# Altium PCB PCB2.pcbdoc
Units mm, origin at the board's own origin, x right, y up, seen from the top; angles counter-clockwise.
Board outline 197.89 x 109.4 mm, 2 copper layers (Top Layer, Bottom Layer); 49 components, 26 nets, 193 pads, 0 vias.
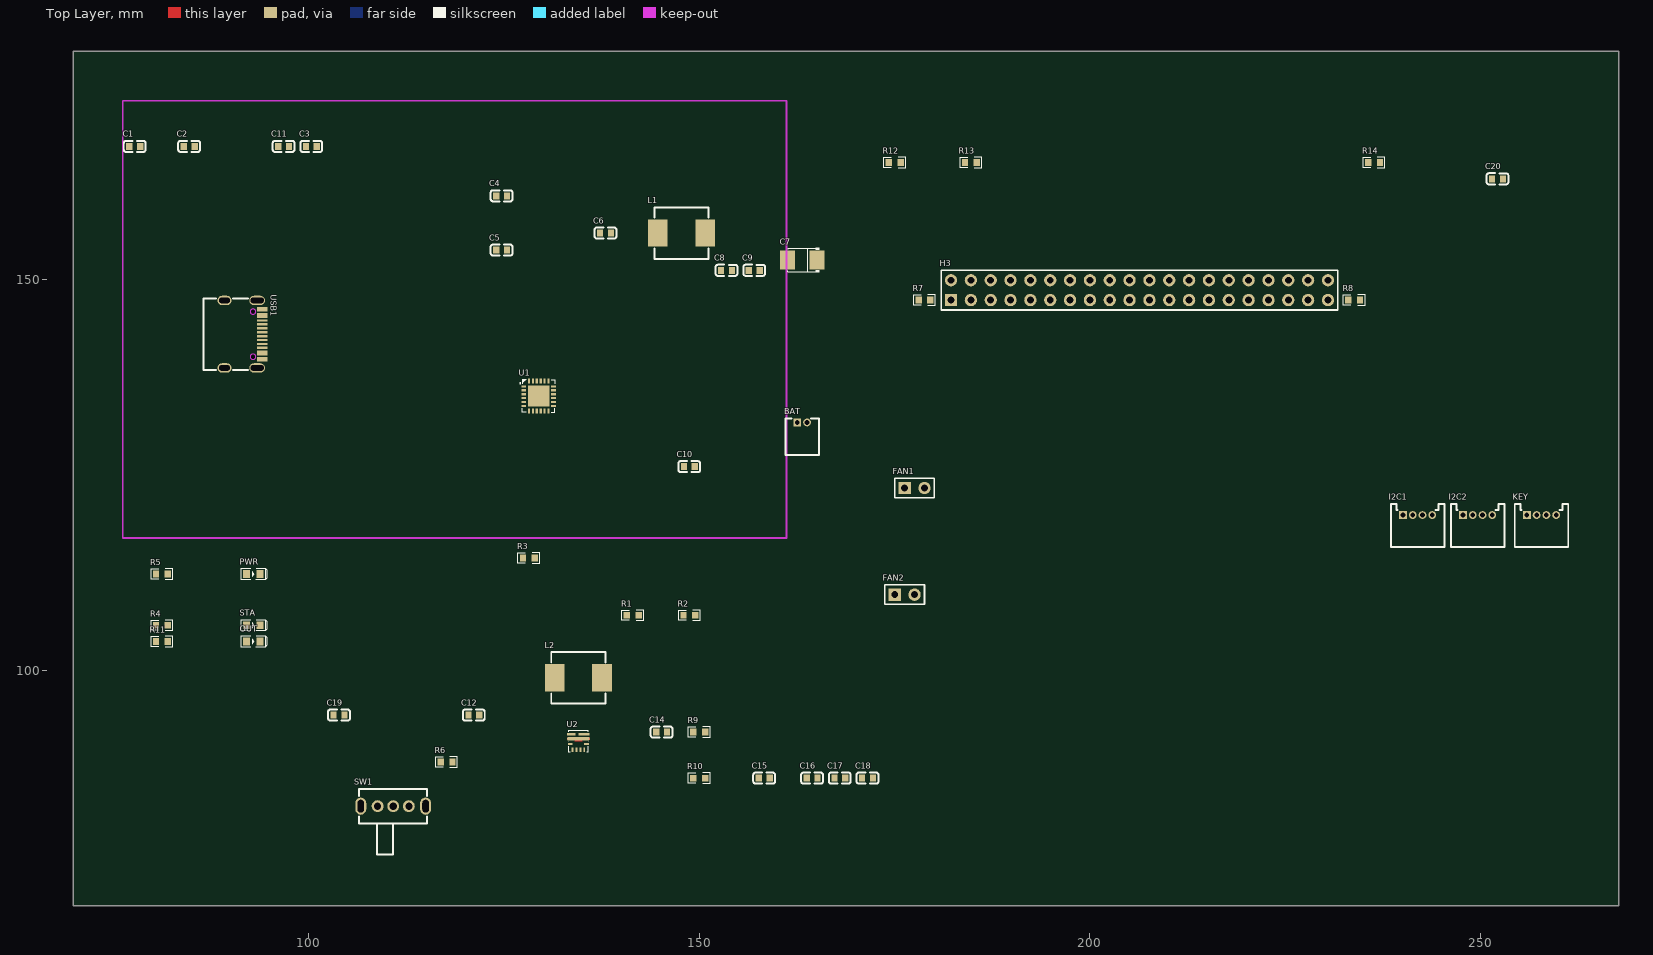
[diagram p0: Top Layer view]
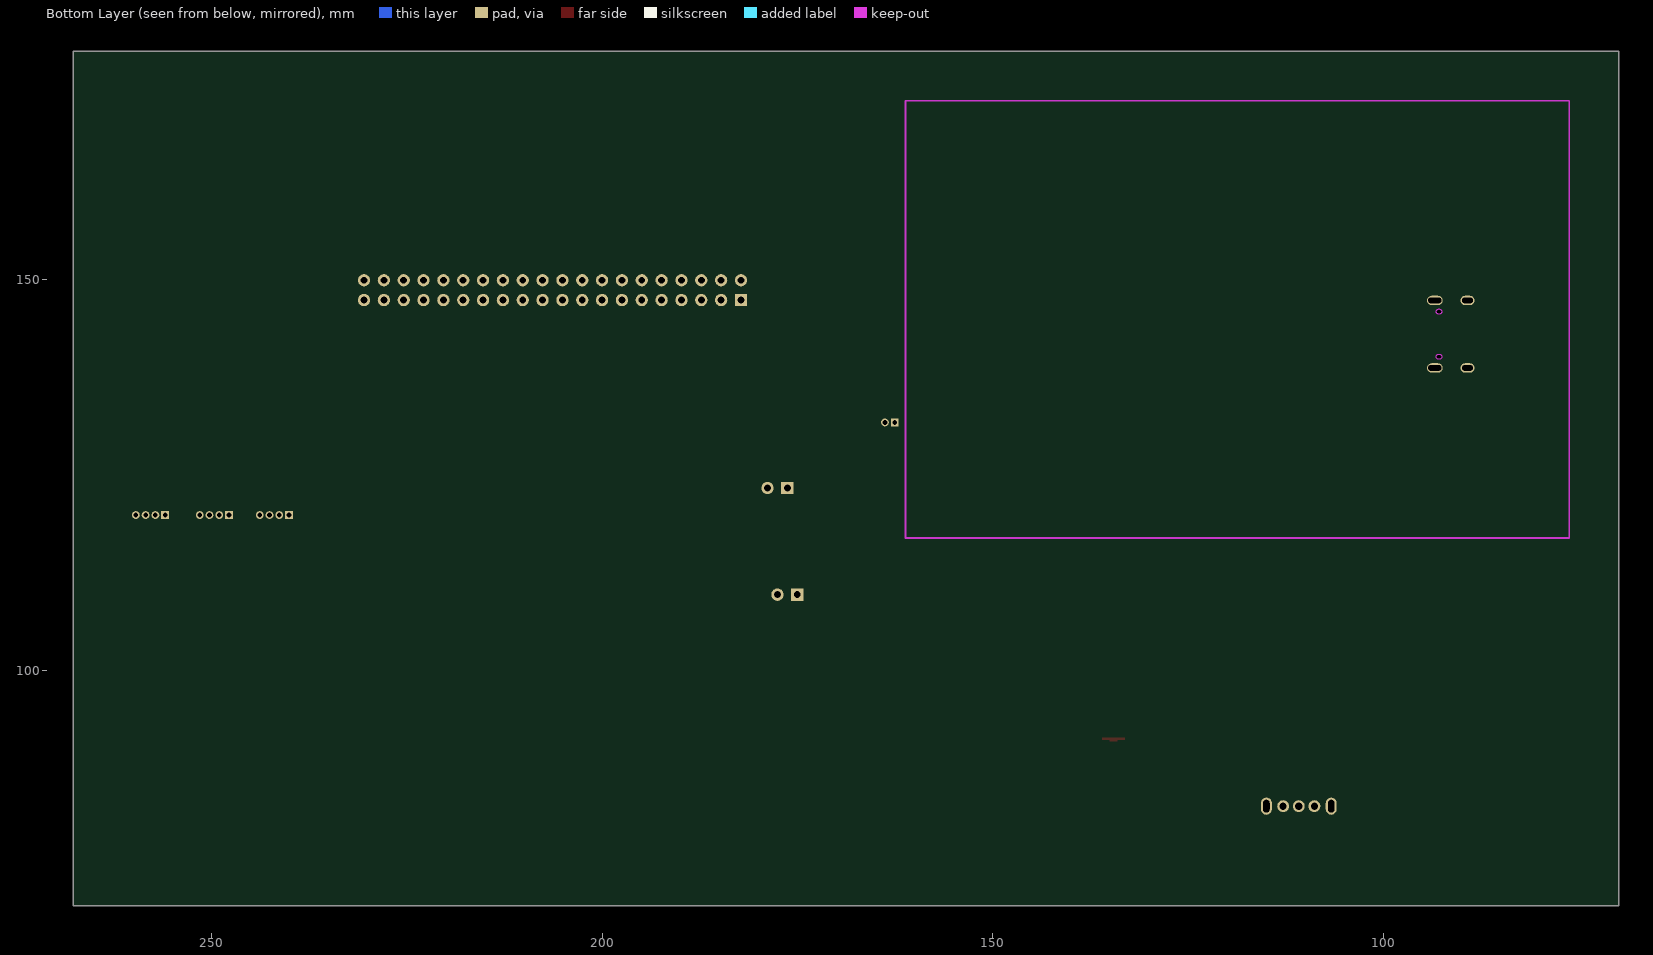
[diagram p1: Bottom Layer view, seen from below]

## Layer stack, top to bottom
Top Layer: signal copper (thickness not stored)
Dielectric: dielectric 0.32, FR-4, Dk 4.8
Bottom Layer: signal copper (thickness not stored)

## Board outline
267.742,69.85 69.85,69.85 69.85,179.251 267.742,179.251

## Components (designator, comment, footprint, x,y, rotation, side; value= is the part's Value field where it differs from the comment)
BAT "1.25-2AW_C2829717" CONN-TH_1.25-2AW_C2829717 163.19,131.72 r0 top
C1 "1u" C0603 77.733,167.059 r0 top
C2 "10u" C0603 84.705,167.059 r0 top
C3 "22u" C0603 100.346,167.059 r0 top
C4 "10u" C0603 124.706,160.727 r0 top
C5 "10u" C0603 124.706,153.783 r0 top
C6 "47n" C0603 138.017,155.962 r0 top
C7 "220u" CAP-SMD_L3.5-W2.8-R-RD 163.19,152.513 r0 top
C8 "10u" C0603 153.504,151.193 r0 top
C9 "10u" C0603 157.054,151.193 r0 top
C10 "10u" C0603 148.741,126.051 r0 top
C11 "10u" C0603 96.797,167.059 r0 top
C12 "1u" C0603 121.156,94.251 r0 top
C14 "33n" C0603 145.191,92.072 r0 top
C15 "22u" C0603 158.324,86.176 r0 top
C16 "22u" C0603 164.46,86.176 r0 top
C17 "22u" C0603 168.009,86.176 r0 top
C18 "22u" C0603 171.559,86.176 r0 top
C19 "10u" C0603 103.896,94.251 r0 top
C20 "CAP_0603" C0603 252.208,162.906 r0 top
FAN1 "FAN" HDR-F-2.54_1X2 177.577,123.317 r0 top
FAN2 "FAN" HDR-F-2.54_1X2 176.307,109.667 r0 top
H3 "HDR-F-2.54_2x20" HDR-F-2.54_2X20 206.372,148.653 r0 top
I2C1 "1.25-4AW" CONN-TH_1.25-4AW 241.976,119.859 r0 top
I2C2 "1.25-4AW" CONN-TH_1.25-4AW 249.668,119.859 r0 top
KEY "1.25-4AW" CONN-TH_1.25-4AW 257.84,119.859 r0 top
L1 "1uH" IND-SMD_L7.0-W6.6_MPCA-0630 147.731,155.962 r0 top
L2 "1uH" IND-SMD_L7.0-W6.6_MPCA-0630 134.534,99.021 r0 top
OUT "LED-0603_G" LED0603_GREEN 92.914,103.685 r0 top
PWR "LED-0603_G" LED0603_GREEN 92.914,112.301 r0 top
R1 "10k" R0603 141.495,107.022 r0 top
R2 "10k" R0603 148.741,107.022 r0 top
R3 "10k" R0603 128.184,114.368 r0 top
R4 "2.2k" R0603 81.211,105.752 r0 top
R5 "2.2k" R0603 81.211,112.301 r0 top
R6 "10k" R0603 117.662,88.255 r0 top
R7 "10k" R0603 178.847,147.383 r0 top
R8 "10k" R0603 233.861,147.383 r0 top
R9 "620k" R0603 150.011,92.072 r0 top
R10 "200k" R0603 150.011,86.176 r0 top
R11 "2.2k" R0603 81.211,103.685 r0 top
R12 "10k" R0603 175.037,164.985 r0 top
R13 "10k" R0603 184.782,164.985 r0 top
R14 "10k" R0603 236.401,164.985 r0 top
STA "LED-0603_G" LED0603_GREEN 92.914,105.752 r0 top
SW1 "SK12D07VG4" SW-TH_SK12D07VG4 110.825,82.587 r0 top
U1 "BQ25895RTWR" QFN-24_L4.0-W4.0-P0.50-TL-EP2.7 129.454,135.083 r0 top
U2 "TPS61236PRWLR" VQFN-9_L2.5-W2.5-P0.50-TL 134.534,90.802 r0 top
USB1 "KH-TYPE-C-16P" USB-C-SMD_KH-TYPE-C-16P 91.644,143.019 r270 top

## Footprints (in the part's own frame and the unit in brackets; to place one, negate y for a bottom-side part, rotate by r counter-clockwise, add the part's x,y. Pads: shape width x height; smd on the part's side, far side on the other; paste and mask are expansions set on the pad)
C0603 [mm]
  rect 0.8x0.9 smd: 1(-0.7,0) 2(0.7,0)
  silkscreen extent -1.41,-0.71 1.39,0.72
CAP-SMD_L3.5-W2.8-R-RD [mm]
  rect 1.9x2.376 smd: 1(1.899,0) 2(-1.899,0)
  silkscreen extent -1.83,-1.55 2.21,1.55
CONN-TH_1.25-2AW_C2829717 [mm]
  rect 1x1 hole 0.6: 1(-0.625,0)
  round 1 hole 0.6 copper offset 0,0: 2(0.625,0)
  silkscreen extent -2.12,-4.2 2.13,0.51
CONN-TH_1.25-4AW [mm]
  rect 1x1 hole 0.6: 1(-1.875,0)
  round 1 hole 0.6: 2(-0.625,0) 3(0.625,0) 4(1.875,0)
  silkscreen extent -3.42,-4.06 3.43,1.4
HDR-F-2.54_1X2 [mil]
  rect 62x62 hole 35: 1(-50,0)
  round 62 hole 35: 2(50,0)
  silkscreen extent -100,-49 100,50
HDR-F-2.54_2X20 [mil]
  rect 62x62 hole 35: 1(-950.01,-50)
  round 62 hole 35: 2(-950.01,50) 3(-850.01,-50) 4(-850.01,50) 5(-750.01,-50) 6(-750.01,50) 7(-650.01,-50) 8(-650.01,50) 9(-550.01,-50) 10(-550.01,50) 11(-450.01,-50) 12(-450.01,50) 13(-350.01,-50) 14(-350.01,50) 15(-250.01,-50) 16(-250.01,50) 17(-150.01,-50) 18(-150.01,50) 19(-50.01,-50) 20(-50.01,50) 21(49.99,-50) 22(49.99,50) 23(149.99,-50) 24(149.99,50) 25(249.99,-50) 26(249.99,50) 27(349.99,-50) 28(349.99,50) 29(449.99,-50) 30(449.99,50) 31(549.99,-50) 32(549.99,50) 33(649.99,-50) 34(649.99,50) 35(749.99,-50) 36(749.99,50) 37(849.99,-50) 38(849.99,50) 39(949.99,-50) 40(949.99,50)
  silkscreen extent -1000,-100 1000,100
IND-SMD_L7.0-W6.6_MPCA-0630 [mm]
  rect 2.5x3.5 smd: 1(-3.025,0) 2(3.025,0)
  silkscreen extent -3.47,-3.3 3.48,3.3
LED0603_GREEN [mm]
  rect 0.9x1 smd: 1(-0.85,0) 2(0.85,0)
  silkscreen extent -1.54,-0.73 1.75,0.73
QFN-24_L4.0-W4.0-P0.50-TL-EP2.7 [mm]
  rect 0.633x0.28 smd: 1(-1.912,1.25) 2(-1.912,0.75) 3(-1.912,0.25) 4(-1.912,-0.25) 5(-1.912,-0.75) 6(-1.912,-1.25) 13(1.912,-1.25) 14(1.912,-0.75) 15(1.912,-0.25) 16(1.912,0.25) 17(1.912,0.75) 18(1.912,1.25)
  rect 0.28x0.633 smd: 7(-1.25,-1.912) 8(-0.75,-1.912) 9(-0.25,-1.912) 10(0.25,-1.912) 11(0.75,-1.912) 12(1.25,-1.912) 19(1.25,1.912) 20(0.75,1.912) 21(0.25,1.912) 22(-0.25,1.912) 23(-0.75,1.912) 24(-1.25,1.912)
  rect 2.7x2.7 smd: 25(0,0)
  silkscreen extent -2.42,-2.08 2.08,2.08
R0603 [mm]
  rect 0.806x0.864 smd: 1(-0.753,0) 2(0.753,0)
  silkscreen extent -1.39,-0.66 1.39,0.66
SW-TH_SK12D07VG4 [mil]
  round 60 hole 36: 1(-78.74,0) 2(0,0) 3(78.74,0)
  oval 55.12x86.61 hole 31.5 slot 62.99 at 90 deg: 4(163.39,0) 5(-163.39,0)
  silkscreen extent -171,-244 171,87
USB-C-SMD_KH-TYPE-C-16P [mm]
  oval 1.2x2 hole 0.7 slot 1.7 at 90 deg: 1(-4.32,1.765) 2(4.32,1.765)
  oval 1.2x1.8 hole 0.7 slot 1.4 at 90 deg: 3(-4.32,-2.415) 4(4.32,-2.415)
  rect 0.3x1.3 smd: A1(-3.35,2.415) A4(-2.55,2.415) A5(-1.25,2.415) A6(-0.25,2.415) A7(0.25,2.415) A8(1.25,2.415) A9(2.55,2.415) A12(3.35,2.415) B1(3.05,2.415) B4(2.25,2.415) B5(1.75,2.415) B6(0.75,2.415) B7(-0.75,2.415) B8(-1.75,2.415) B9(-2.25,2.415) B12(-3.05,2.415)
  Multi-Layer board cut-out: -2.89,1.585 -3.063,1.537 -3.19,1.409 -3.236,1.235 -3.19,1.061 -3.063,0.933 -2.89,0.885 -2.89,0.885 -2.717,0.933 -2.59,1.061 -2.544,1.235 -2.59,1.409 -2.717,1.537 -2.89,1.585
  Multi-Layer board cut-out: 2.89,1.585 2.717,1.537 2.59,1.409 2.544,1.235 2.59,1.061 2.717,0.933 2.89,0.885 2.89,0.885 3.063,0.933 3.19,1.061 3.236,1.235 3.19,1.409 3.063,1.537 2.89,1.585
  Multi-Layer keep-out region: -2.89,1.585 -3.063,1.537 -3.19,1.409 -3.236,1.235 -3.19,1.061 -3.063,0.933 -2.89,0.885 -2.89,0.885 -2.717,0.933 -2.59,1.061 -2.544,1.235 -2.59,1.409 -2.717,1.537 -2.89,1.585
  Multi-Layer keep-out region: 2.89,1.585 2.717,1.537 2.59,1.409 2.544,1.235 2.59,1.061 2.717,0.933 2.89,0.885 2.89,0.885 3.063,0.933 3.19,1.061 3.236,1.235 3.19,1.409 3.063,1.537 2.89,1.585
  silkscreen extent -4.57,-5.08 4.57,0.57
VQFN-9_L2.5-W2.5-P0.50-TL [mm]
  rect 1.1x0.3 smd: 1(-0.9,1.01)
  oval 2.9x0.45 smd: 2(0,0.41)
  rect 0.6x0.25 smd: 3(-1.05,-0.235) 8(1.05,-0.235)
  rect 0.25x0.6 smd: 4(-0.75,-1.01) 5(-0.25,-1.01) 6(0.25,-1.01) 7(0.75,-1.01)
  rect 1.45x0.3 smd: 9(0.725,1.01)
  Top Layer region: -1.45,0.26 -1.45,0.56 1.45,0.56 1.45,0.26 0.488,0.26 0.488,0.11 -0.487,0.11 -0.487,0.26
  silkscreen extent -1.27,-1.22 1.27,1.45

## Nets (pads, with @x,y where several pads share a name; then routed paths per layer and width w, separated by ;. In a path a pad name is that pad's centre, name@x,y a point inside that pad or via, vN(x,y) a via of type N, cw(c..) or ccw(c..) an arc to the next point about the centre after c; other vN are vias at no path point)
$2N173: C5.1 U1.23
$2N199: C6.1 U1.21
$2N200: C6.2 L1.1 U1.19 U1.20
$2N283: R3.1 U1.9
$2N313: R1.2 R2.1 U1.11
$2N359: R4.2 STA.1
$2N385: L2.2 U2.2
$2N411: R6.2 U2.7
$2N437: C14.1 R9.1 R10.2 U2.6
$2N514: OUT.1 R11.2
$2N622: U1.2 U1.3
$2N659: PWR.1 R5.2
$2N803: R6.1 SW1.2
BAT: BAT.1 C10.2 U1.13 U1.14
GND: BAT.2 C1.1 C2.1 C3.1 C4.2 C5.2 C7.2 C8.1 C9.1 C10.1 C11.1 C12.1 C15.1 C16.1 C17.1 C18.1 C19.1 C20.1 FAN1.2 FAN2.2 H3.6 H3.14 H3.20 H3.34 I2C1.2 I2C2.2 KEY.2 OUT.2 PWR.2 R2.2 R3.2 R10.1 SW1.1 SW1.4 SW1.5 U1.8 U1.10 U1.17 U1.18 U1.25 U2.1 U2.4 U2.5 U2.8 USB1.1 USB1.2 USB1.3 USB1.4 USB1.A1 USB1.A12 USB1.B1 USB1.B12
INT: H3.7 R14.1 U1.7
KEY1: H3.29 KEY.3 R7.1
KEY2: H3.31 KEY.4 R8.1
SCL: H3.5 I2C1.3 I2C2.3 R13.1 U1.5
SDA: H3.3 I2C1.4 I2C2.4 R12.1 U1.6
STAT: STA.2 U1.4
VBUS: C1.2 C2.2 C3.2 C11.2 R5.1 U1.1 USB1.A4 USB1.A9 USB1.B4 USB1.B9
VOUT: C14.2 C15.2 C16.2 C17.2 C18.2 C20.2 FAN1.1 FAN2.1 H3.2 H3.4 I2C1.1 I2C2.1 KEY.1 R7.2 R8.2 R9.2 R11.1 R12.2 R13.2 R14.2 U2.9
VREGN: C4.1 R1.1 U1.22
VSYS: C7.1 C8.2 C9.2 C12.2 C19.2 L1.2 L2.1 R4.1 SW1.3 U1.15 U1.16 U2.3
"": H3.1 H3.8 H3.9 H3.10 H3.11 H3.12 H3.13 H3.15 H3.16 H3.17 H3.18 H3.19 H3.21 H3.22 H3.23 H3.24 H3.25 H3.26 H3.27 H3.28 H3.30 H3.32 H3.33 H3.35 H3.36 H3.37 H3.38 H3.39 H3.40 U1.12 U1.24 USB1.A5 USB1.A6 USB1.A7 USB1.A8 USB1.B5 USB1.B6 USB1.B7 USB1.B8

## Keep-outs
Board Outline Layer:
  lines w0.254 net "": 76.2,116.901 161.2,116.901 161.2,172.901 76.2,172.901 76.2,116.901